# Altium PCB DVT-PSU-LM5116-HT.PcbDoc
Units mm, origin at the board's own origin, x right, y up, seen from the top; angles counter-clockwise.
Board outline 105 x 90 mm, 2 copper layers (Top Layer, Bottom Layer); 39 components, 19 nets, 96 pads, 1 vias.
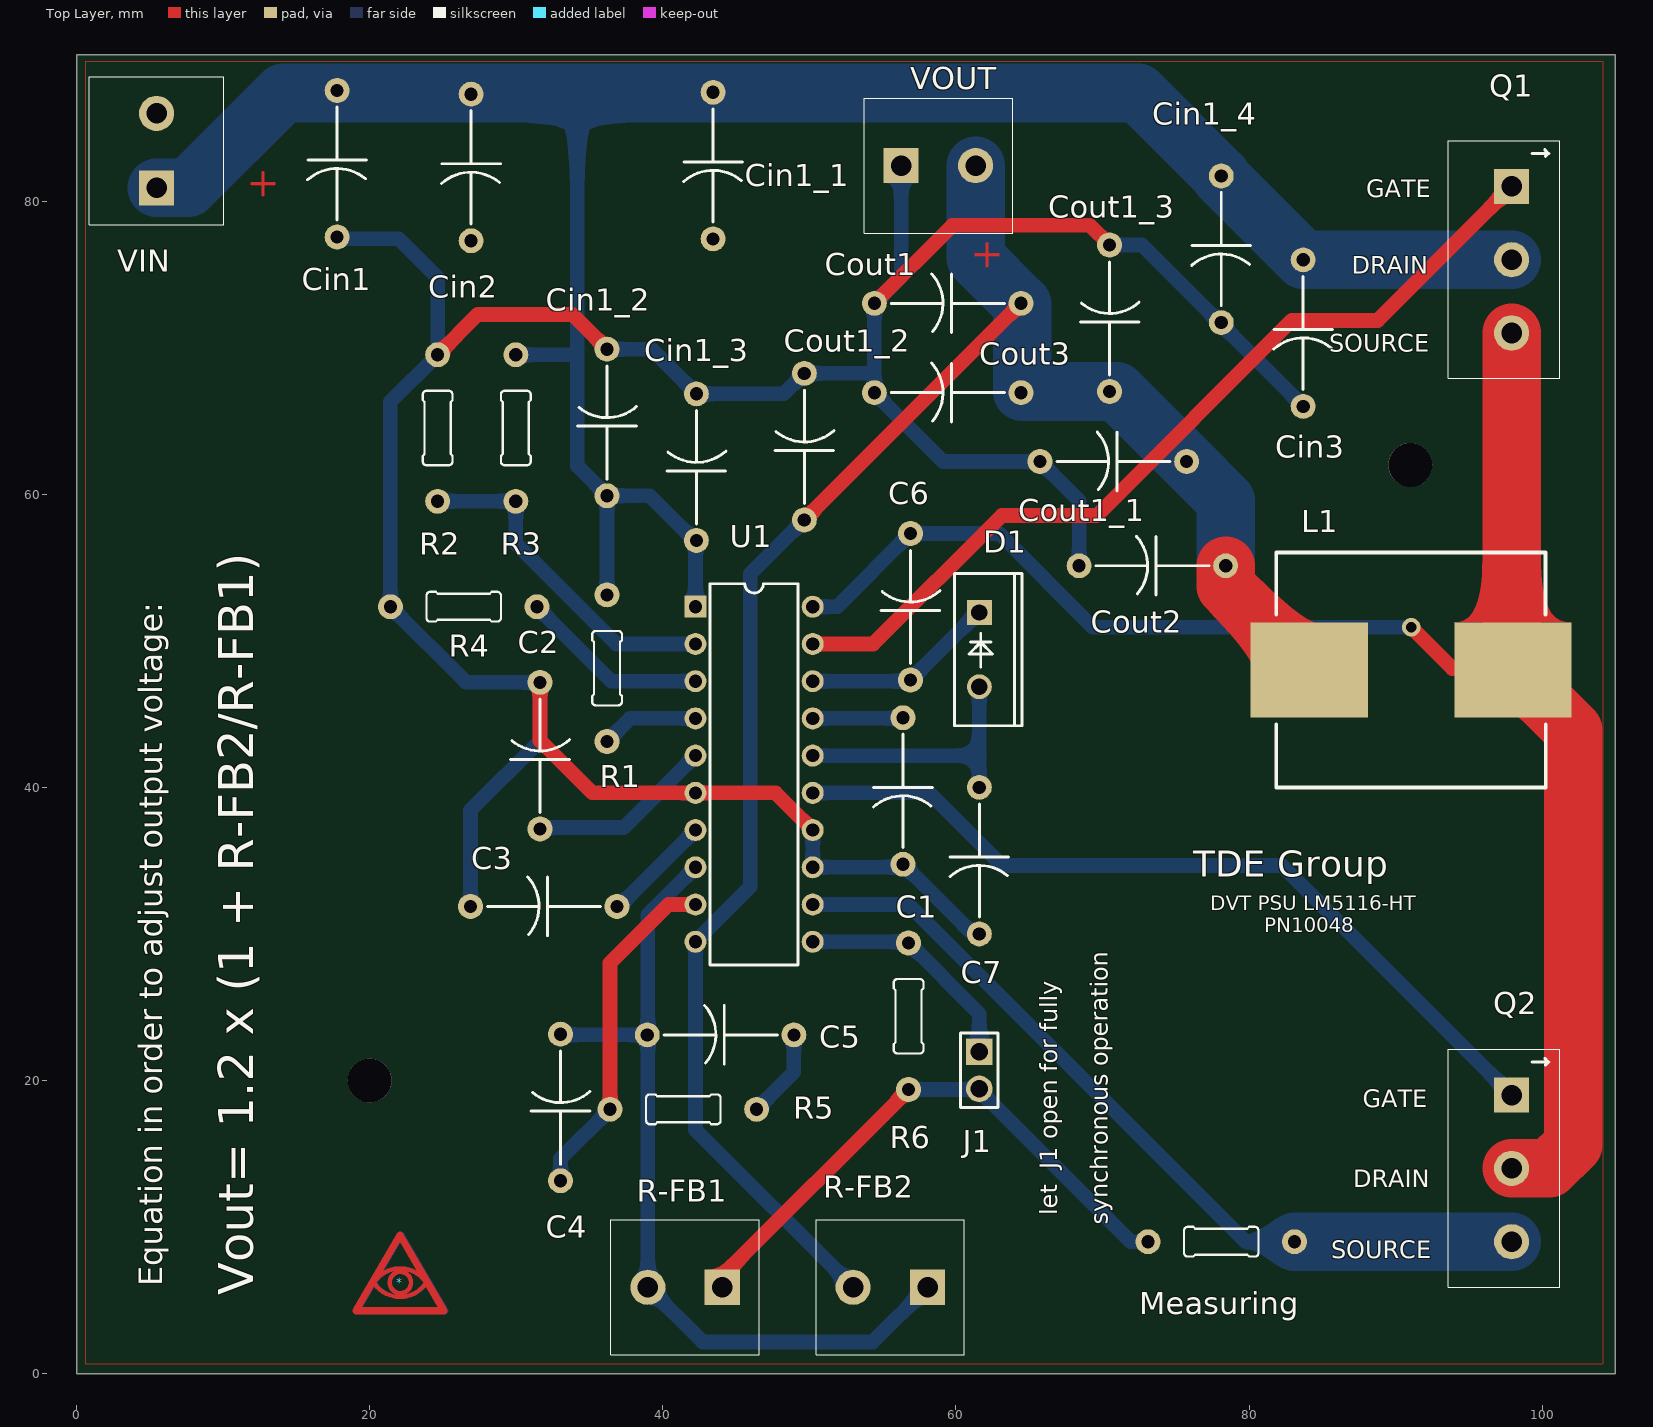
[diagram p0: Top Layer view]
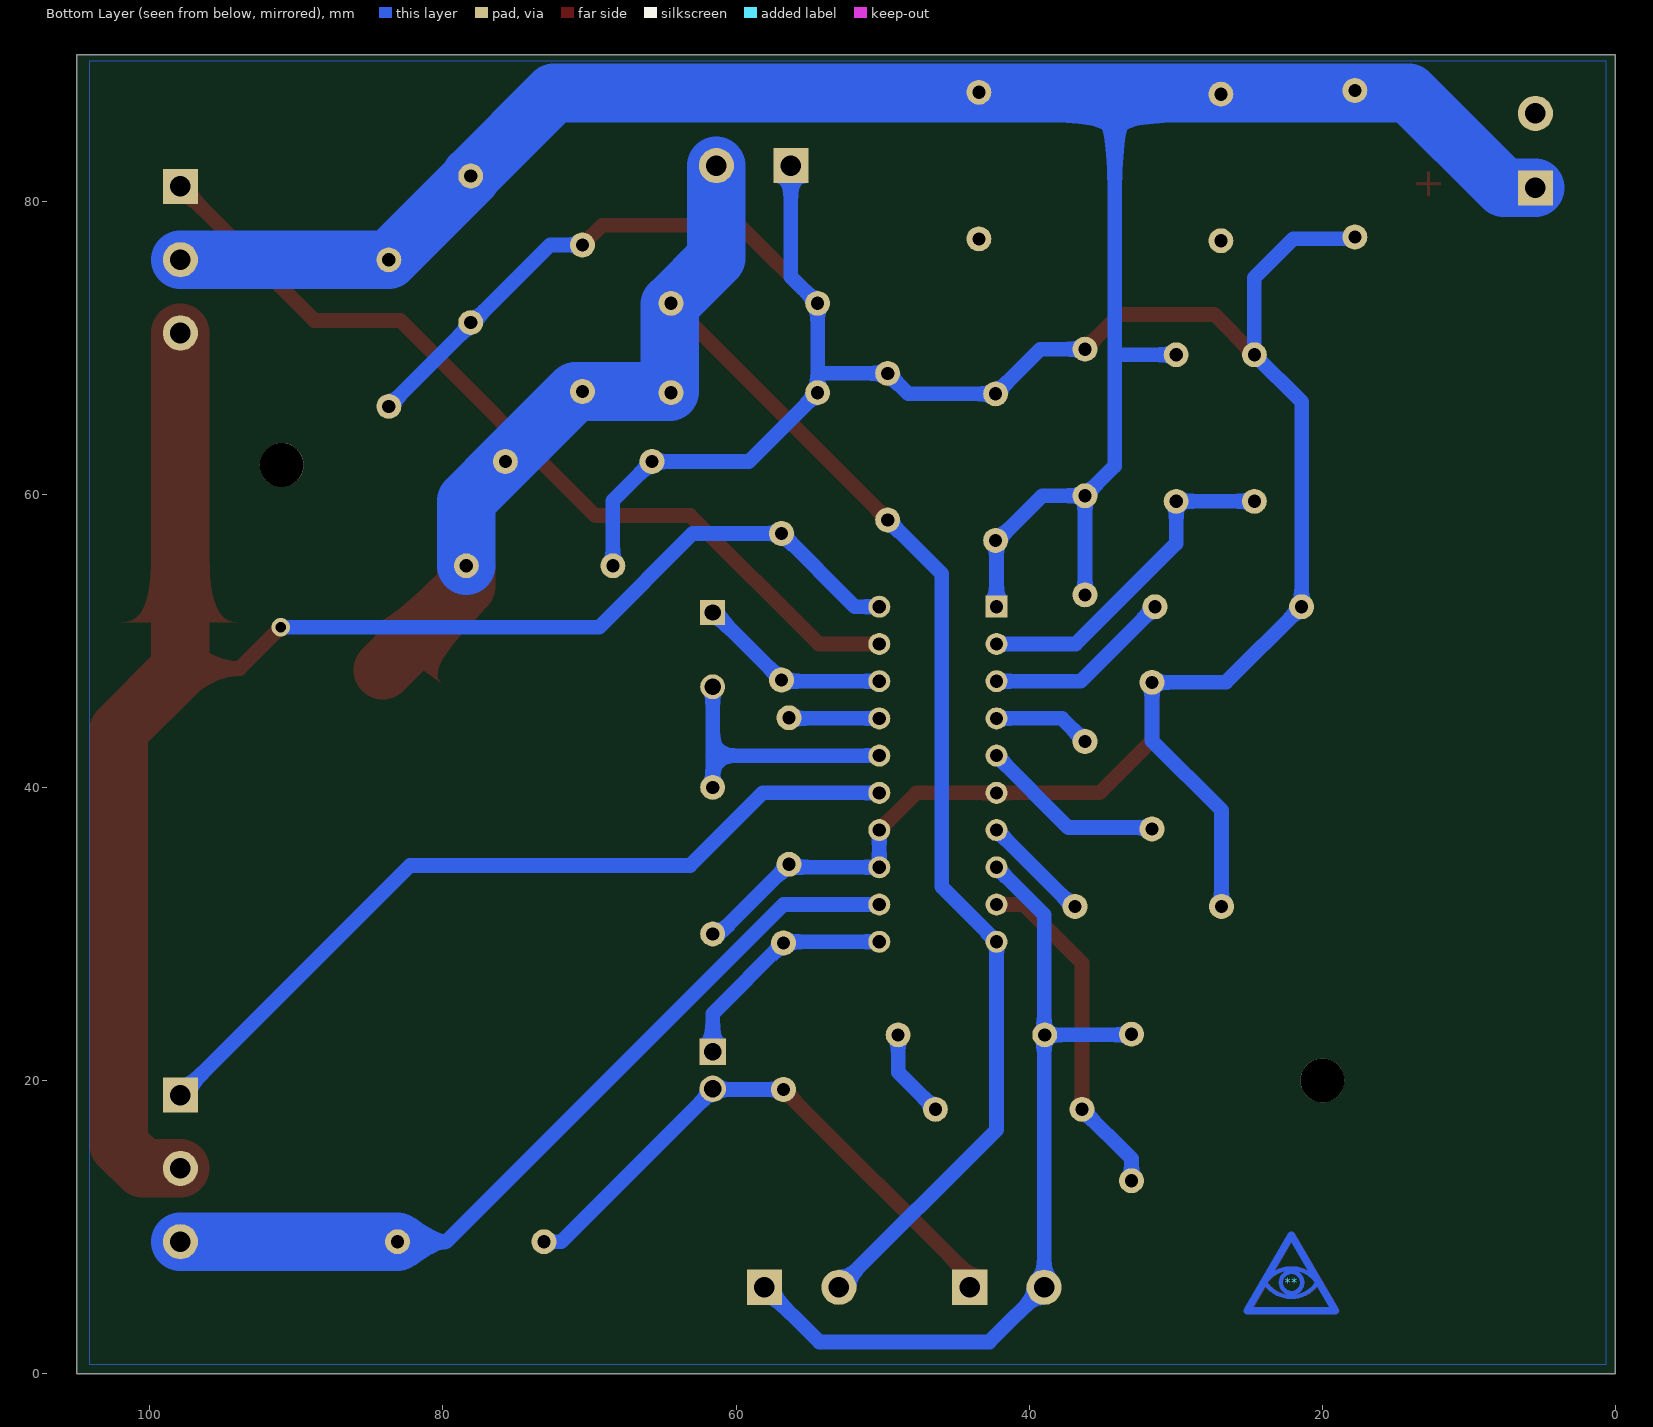
[diagram p1: Bottom Layer view, seen from below]

## Layer stack, top to bottom
Top Solder: solder mask 0.0102, Solder Resist, Dk 3.5
Top Layer: signal copper 0.0356
Dielectric 1: dielectric 0.32, FR-4, Dk 4.8
Bottom Layer: signal copper 0.0356
Bottom Solder: solder mask 0.0102, Solder Resist, Dk 3.5

## Board outline
0,0 105,0 105,90 0,90

## Design rules (kind name [scope] priority, off if disabled: settings)
Clearance Polygons [InPolygon] p1: gap=0.254
Clearance [All] p2: gap=0.15
MinimumSolderMaskSliver [All] p1: minsoldermaskwidth=0.1
PolygonConnect [All] p1: connectstyle=Relief reliefconductorwidth=0.254 reliefentries=4 polygonreliefangle="90 Angle" airgapwidth=0.254
RoomDefinition DVT-PSU-LM5116-HT_2 [InComponentClass('DVT-PSU-LM5116-HT_2')] p1: confinementstyle=ConfineIn formatcopy=TRUE lockcomponents=FALSE outline -12.827,-6.223 125.349,-6.223 125.349,97.028 -12.827,97.028
RoomDefinition DVT-PSU-LM5116-HT_1 [InComponentClass('DVT-PSU-LM5116-HT_1')] p2: confinementstyle=ConfineIn formatcopy=TRUE lockcomponents=FALSE outline -13.843,-9.398 119.253,-9.398 119.253,97.282 -13.843,97.282
RoutingVias [All] p1: holewidth=0.711 width=1.27 viastyle="Through Hole" minholewidth=0 minwidth=0 maxholewidth=0.711 maxwidth=1.27
SilkToSilkClearance [All] p1: silktosilkclearance=0
SilkToSolderMaskClearance [IsPad] p1: minsilkscreentomaskgap=0.1 clearancetoexposedcopper=TRUE
SolderMaskExpansion [All] p1: expansion=0.102
Width [All] p1: maxlimit=4 minlimit=0.254 preferedwidth=0.5
27 further rules are at their usual default settings.

## Classes and differential pairs
component class DVT-PSU-LM5116-HT_1: * C1 C2 C3 C4 C5 C6 C7 Cin1 Cin1_1 Cin1_2 Cin1_3 Cin1_4 Cin2 Cin3 D1 R1 R2 R3 R4 R5 R-FB1 R-FB2 U1 VIN
component class DVT-PSU-LM5116-HT_2: ** Cout1 Cout1_1 Cout1_2 Cout1_3 Cout2 Cout3 J1 L1 Measuring Q1 Q2 R6 VOUT

## Components (designator, comment, footprint, x,y, rotation, side; value= is the part's Value field where it differs from the comment)
* "Eye" Eye 22.098,6.223 r0 top
** "Eye" Eye 22.098,6.223 r180 bottom
C1 "Capacitor-Dummy-THT" Dummy-10mm 56.388,39.751 r270 top
C2 "Capacitor-Dummy-THT" Dummy-10mm 31.623,42.164 r90 top
C3 "Capacitor-Dummy-THT" Dummy-10mm 31.877,31.877 r180 top
C4 "Capacitor-Dummy-THT" Dummy-10mm 33.02,18.161 r90 top
C5 "Capacitor-Dummy-THT" Dummy-10mm 43.942,23.114 r180 top
C6 "Capacitor-Dummy-THT" Dummy-10mm 56.896,52.324 r90 top
C7 "Capacitor-Dummy-THT" Dummy-10mm 61.595,35 r270 top
Cin1 "Capacitor-Dummy-THT" Dummy-10mm 17.78,82.55 r270 top
Cin1_1 "Capacitor-Dummy-THT" Dummy-10mm 43.434,82.423 r270 top
Cin1_2 "Capacitor-Dummy-THT" Dummy-10mm 36.195,64.897 r90 top
Cin1_3 "Capacitor-Dummy-THT" Dummy-10mm 42.291,61.849 r90 top
Cin1_4 "Capacitor-Dummy-THT" Dummy-10mm 78.105,76.708 r270 top
Cin2 "Capacitor-Dummy-THT" Dummy-10mm 26.924,82.296 r270 top
Cin3 "Capacitor-Dummy-THT" Dummy-10mm 83.693,70.993 r270 top
Cout1 "Capacitor-Dummy-THT" Dummy-10mm 59.436,73.025 r180 top
Cout1_1 "Capacitor-Dummy-THT" Dummy-10mm 70.739,62.23 r180 top
Cout1_2 "Capacitor-Dummy-THT" Dummy-10mm 49.657,63.246 r90 top
Cout1_3 "Capacitor-Dummy-THT" Dummy-10mm 70.485,72.009 r90 top
Cout2 "Capacitor-Dummy-THT" Dummy-10mm 73.406,55.118 r180 top
Cout3 "Capacitor-Dummy-THT" Dummy-10mm 59.436,66.929 r180 top
D1 "GB02SLT12-220" TO220AC 61.595,49.403 r270 top
J1 "Plug_2_90_2.54" HDR1X2 61.595,20.701 r270 top
L1 "4u7H7.5A" WE-LHMI1335 91.059,48.006 r180 top
Measuring "Resistor-Dummy-THT" Dummy-10mm 78.105,9 r0 top
Q1 "3Pol_TBL_5mm" WE-TBL3-5 97.915,76 r270 top locked
Q2 "3Pol_TBL_5mm" WE-TBL3-5 97.915,14 r270 top locked
R1 "Resistor-Dummy-THT" Dummy-10mm 36.195,48.133 r270 top
R2 "Resistor-Dummy-THT" Dummy-10mm 24.638,64.516 r270 top
R3 "Resistor-Dummy-THT" Dummy-10mm 29.972,64.516 r90 top
R4 "Resistor-Dummy-THT" Dummy-10mm 26.416,52.324 r0 top
R5 "Resistor-Dummy-THT" Dummy-10mm 41.402,18.034 r180 top
R6 "Resistor-Dummy-THT" Dummy-10mm 56.769,24.384 r270 top
R-FB1 "PHOENIX_1715721" Phoenix-2-5_08 41.522,5.889 r180 top
R-FB2 "PHOENIX_1715721" Phoenix-2-5_08 55.522,5.889 r180 top
U1 "LM5116HJD" DIP-20-Ceramic-HT 46.228,40.894 r270 top
VIN "PHOENIX_1715721" Phoenix-2-5_08 5.461,83.439 r90 top
VOUT "PHOENIX_1715721" Phoenix-2-5_08 58.801,82.423 r0 top

## Footprints (in the part's own frame and the unit in brackets; to place one, negate y for a bottom-side part, rotate by r counter-clockwise, add the part's x,y. Pads: shape width x height; smd on the part's side, far side on the other; paste and mask are expansions set on the pad)
DIP-20-Ceramic-HT [mm] "DIP; 20 Leads; Row Spacing 7.62 mm; Pitch 2.54 mm"
  rect 1.5x1.5 hole 0.9: 1(-11.43,-4)
  round 1.5 hole 0.9: 2(-8.89,-4) 3(-6.35,-4) 4(-3.81,-4) 5(-1.27,-4) 6(1.27,-4) 7(3.81,-4) 8(6.35,-4) 9(8.89,-4) 10(11.43,-4) 11(11.43,4) 12(8.89,4) 13(6.35,4) 14(3.81,4) 15(1.27,4) 16(-1.27,4) 17(-3.81,4) 18(-6.35,4) 19(-8.89,4) 20(-11.43,4)
  silkscreen extent -13,-3 13,3, body extent -12.99,-4.86 13.02,4.91, height 4
Dummy-10mm [mm] "Dummy-10mm"
  round 1.7 hole 0.9: 1(-5,0) 2(5,0)
  silkscreen extent -3.88,-2.01 3.85,2, body extent -2.39,-0.88 2.41,0.88, height 1.87
Eye [mm]
  Top Layer circle w0.3: c-0.005,-0.005 r0.728
  Top Layer lines w0.3: -1.862,0.058 ccw(c-0.03,1.138) 1.792,0.042 ; -1.796,0.014 cw(c-0.03,-1.17) 1.74,0.007
  Top Layer lines w0.5: -3.03,-1.93 -0.025,3.225 2.97,-1.93 -3.03,-1.93
HDR1X2 [mm] "Connector; Header; 2 Position"
  rect 1.8x1.8 hole 1.2: 1(-1.27,0)
  round 1.8 hole 1.2: 2(1.27,0)
  silkscreen extent -2.54,-1.27 2.54,1.27, body extent -2.54,-1.27 2.54,1.27, height 8.62
Phoenix-2-5_08 [mm] "Phoenix, 1715721"
  rect 2.4x2.4 hole 1.4: 1(-2.54,0)
  round 2.4 hole 1.4: 2(2.54,0)
  silkscreen extent -5.06,-4.6 5.06,4.6, body extent -5.05,-5.19 5.85,4.61, height 14.2
TO220AC [mm] "TO, Thru-Hole, Vertical, Heatsink Mounted; 2 In-Line Leads; Pitch 2.54 mm; Pin sequence 1,2"
  rect 1.7x1.7 hole 1.1: 1(-2.54,0)
  round 1.7 hole 1.1: 2(2.54,0)
  silkscreen extent -5.2,-1.7 5.2,2.9, body extent -5.37,-1.84 5.34,2.96, height 17
WE-LHMI1335 [mm] "Chip , Body 18.2x18.2"
  rect 8x6.5 smd: 1(-6.95,0) 2(6.95,0)
  silkscreen extent -9.19,-8.01 9.21,8.01, body extent -6.6,-6.61 6.9,5.99, height 3.4
WE-TBL3-5 [mm] "WE, 691102710003"
  rect 2.4x2.4 hole 1.4: 1(-5,0)
  round 2.4 hole 1.4: 2(0,0) 3(5,0)
  silkscreen extent -8.12,-4.32 8.1,3.29, body extent -8.11,-4.25 8.09,3.25, height 9.95

## Part data
D1: "Diode Shottky, 1200V, 2A"
J1: "Plug, 2-Pin"
L1: "WE, LHMI"
Measuring: "LVR01, 0.01 ohm, 1 W, ± 1%"
Q1 Q2: "Plug,-3-Pin"
R-FB1 R-FB2 VIN VOUT: library part 2Pol_1715721, "Phoenix, 2 pol, 5.08mm, 22A, 715721"
U1: "Step-Down controller, wide range input, HT"

## Free pads (board coordinates)
  round 3 hole 3 unplated: 0(20,20) 1(91,62)

## Via types
v1: diameter 1.27, hole 0.711, Top Layer to Bottom Layer, 1 vias

## Nets (pads, with @x,y where several pads share a name; then routed paths per layer and width w, separated by ;. In a path a pad name is that pad's centre, name@x,y a point inside that pad or via, vN(x,y) a via of type N, cw(c..) or ccw(c..) an arc to the next point about the centre after c; other vN are vias at no path point)
GND: C1.2 C2.2 C3.2 C7.2 Cin1.2 Cin1_1.2 Cin1_2.2 Cin1_3.2 Cin1_4.2 Cin2.2 Cin3.2 Cout1.2 Cout1_1.2 Cout1_2.2 Cout1_3.2 Cout2.2 Cout3.2 J1.2 Measuring.1 pad.0 pad.1 R2.1 R4.1 R6.2 R-FB1.1 U1.6 U1.13 U1.14 VIN.2 VOUT.1 | length 249.6
  Top Layer w1: R2.1 27.385,72.263 33.829,72.263 Cin1_2.2 ; C2.2 31.623,43.18 35.179,39.624 U1.6 47.688,39.624 U1.14 ; R-FB1.1 44.062,6.677 R6.2 ; Cout1.2 59.77,78.359 69.135,78.359 Cout1_3.2
  Bottom Layer w1: Cin1.2@17.78,77.423 21.971,77.423 24.638,74.756 R2.1 21.416,66.294 R4.1 26.576,47.164 C2.2 31.623,43.18 26.877,38.434 C3.2 ; Cin1_2.2 39.243,69.897 Cin1_3.2 48.26,66.849 Cout1_2.2 54.356,68.246 ; U1.14 U1.13 56.595,34.544 61.139,30 C7.2 ; VOUT.1 56.261,74.85 Cout1.2 Cout3.2 59.135,62.23 Cout1_1.2 68.406,59.563 Cout2.2 ; R6.2 61.548,19.384 71.932,9 Measuring.1 ; Cout1_3.2 72.677,77.009 Cin3.2
NetC1_1: C1.1 U1.17 | length 6.1
  Bottom Layer w1: U1.17 C1.1@56.341,44.704
NetC2_1: C2.1 U1.5 | length 12.3
  Bottom Layer w1: C2.1@32.004,37.258 37.322,37.258 U1.5
NetC3_1: C3.1 U1.7 | length 7.5
  Bottom Layer w1: C3.1@36.949,31.805 U1.7
NetC4_1: C4.1 R5.2 U1.9 | length 23.7
  Top Layer w1: R5.2 36.402,28.02 40.386,32.004 U1.9
  Bottom Layer w1: C4.1 33.02,14.652 R5.2
NetC4_2: C4.2 C5.2 R-FB1.2 R-FB2.1 U1.8 | length 58
  Bottom Layer w1: C4.2@33.067,23.114 C5.2 ; U1.8 38.982,31.298 R-FB1.2 42.712,2.159 54.332,2.159 R-FB2.1
NetC5_1: C5.1 R5.1 | length 6.1
  Bottom Layer w1: R5.1 48.942,20.574 C5.1
NetC6_1: C6.1 D1.1 U1.18 | length 13.3
  Bottom Layer w1: U1.18 56.816,47.244 C6.1 61.515,51.943 D1.1
NetC6_2: C6.2 L1.1 Q1.3 Q2.2 U1.20 | length 115.6
  Top Layer w1: v1(91.059,50.927) 93.886,48.1 L1.1@97.915,48.1
  Top Layer w4: Q2.2 100.487,14 102.108,15.621 102.108,43.907 L1.1 97.915,48.1 Q1.3
  Bottom Layer w1: U1.20 51.896,52.324 C6.2 62.945,57.324 69.342,50.927 v1(91.059,50.927)
NetC7_1: C7.1 D1.2 U1.16 | length 18.2
  Bottom Layer w1: U1.16 61.595,42.164 ; C7.1 D1.2
NetCout1_1: Cout1.1 Cout1_1.1 Cout1_2.1 Cout1_3.1 Cout2.1 Cout3.1 L1.2 R-FB2.2 U1.10 VOUT.2 | length 128.4
  Top Layer w1: Cout1_2.1 Cout1.1
  Top Layer w4: Cout2.1 78.406,53.709 L1.2
  Bottom Layer w1: Cout1_2.1 45.974,54.563 45.974,33.21 U1.10 42.228,16.643 R-FB2.2
  Bottom Layer w4: VOUT.2 61.341,76.12 Cout1.1 64.516,72.945 64.516,67.009 Cout1_3.1 70.96,67.009 Cout1_1.1 78.406,59.563 Cout2.1
NetJ1_1: J1.1 R6.1 U1.11 | length 16
  Bottom Layer w1: U1.11 56.689,29.464 R6.1 61.595,24.558 J1.1
NetMeasuring_2: Measuring.2 Q2.3 U1.12 | length 57.2
  Bottom Layer w1: U1.12 56.769,32.004 79.773,9 Measuring.2
  Bottom Layer w4: Measuring.2 Q2.3
NetQ1_1: Q1.1 U1.19 | length 60.6
  Top Layer w1: U1.19 54.356,49.784 63.119,58.547 69.596,58.547 82.907,71.858 88.773,71.858 Q1.1
NetQ2_1: Q2.1 U1.15 | length 56.2
  Bottom Layer w1: U1.15 58.166,39.624 63.119,34.671 82.244,34.671 Q2.1
NetR1_2: R1.2 U1.4 | length 6.7
  Bottom Layer w1: R1.2 37.766,44.704 U1.4
NetR2_2: R2.2 R3.1 U1.2 | length 23.3
  Bottom Layer w1: R2.2 R3.1 29.972,56.642 36.83,49.784 U1.2
NetR4_2: R4.2 U1.3 | length 12.9
  Bottom Layer w1: R4.2 36.496,47.244 U1.3
VIN: Cin1.1 Cin1_1.1 Cin1_2.1 Cin1_3.1 Cin1_4.1 Cin2.1 Cin3.1 Q1.2 R1.1 R3.2 U1.1 VIN.1 | length 150.9
  Bottom Layer w1: R3.2 34.116,69.516 ; 34.163,87.376 34.163,61.929 Cin1_2.1 ; R1.1 Cin1_2.1 ; U1.1 42.228,56.786 39.117,59.897 Cin1_2.1
  Bottom Layer w4: VIN.1 7.62,80.899 14.097,87.376 34.163,87.376 72.437,87.376 Cin1_4.1 78.105,81.581 Cin3.1 ; Cin3.1@83.693,76 Q1.2

## Polygon pours and split planes (outlines as drawn)
GND on Top Layer "GND-Top" (solid, shelved, pour order 0): 0.635,0.635 0.635,89.535 104.14,89.535 104.14,0.635
GND on Bottom Layer "GND-Bottom" (solid, shelved, pour order 2): 0.635,0.635 0.635,89.535 104.14,89.535 104.14,0.635

## Other copper
Top Layer:
  text "+" at 13.589,80.01 h2 r90
  text "+" at 62.992,75.184 h2 r90

## Silkscreen, mask and mechanical layers (free items; w line width, h text height)
Top Overlay:
  text "GATE" at 88.011,80.264 h1.2
  text "DRAIN" at 86.995,75.057 h1.2
  text "SOURCE" at 85.471,69.723 h1.2
  text "TDE Group" at 76.2,33.909 h1.8
  text "DVT PSU LM5116-HT" at 77.343,31.623 h1
  text "PN10048" at 81.026,30.099 h1
  text "GATE" at 87.757,18.161 h1.2
  text "DRAIN" at 87.122,12.7 h1.2
  text "let  J1 open for fully" at 66.929,10.795 h1.2 r90
  text "synchronous operation" at 70.358,10.16 h1.2 r90
  text "SOURCE" at 85.598,7.874 h1.2
  text "Equation in order to adjust output voltage:" at 5.842,5.969 h1.6 r90
  text "Vout= 1.2 x (1 + R-FB2/R-FB1)" at 12.065,5.334 h2.4 r90
Top Solder:
  lines w4: 78.406,55.118 78.406,53.674 84.074,48.006 ; 97.915,14 100.487,14 102.108,15.621 102.108,43.942 97.915,48.135 97.915,71
  text "+" at 13.589,80.01 h2 r90
  text "+" at 62.992,75.184 h2 r90
Bottom Solder:
  lines w4: 5.461,80.899 7.62,80.899 7.874,81.153 14.144,87.423 72.39,87.423 83.813,76 97.915,76 ; 61.341,82.423 61.341,76.12 64.516,72.945 64.516,67.056 70.866,67.056 78.406,59.516 78.406,55.118
Measuring:
  circle w0.254: c20,20 r1.6
  circle w0.254: c91,62 r1.6
Outline:
  the board outline again, w0.1

## Dimensions
105,0 to 105,90 on Mechanical 16
105,0 to 0,0 on Mechanical 16
0,90 to 91,63.6 on Mechanical 16
0,0 to 20,18.4 on Mechanical 16
18.4,20 to 0,0 on Mechanical 16
92.6,62 to 105,0 on Mechanical 16